# Altium PCB JacDacRHTemp_Panel.PcbDoc (part 1 of 2)
Units mm, origin at the board's own origin, x right, y up, seen from the top; angles counter-clockwise.
Board outline 188.07 x 95 mm, 2 copper layers (Top Layer, Bottom Layer); 1 components, 34 nets, 50 pads, 167 vias.
Unrouted connection lines stored in the file: 5.
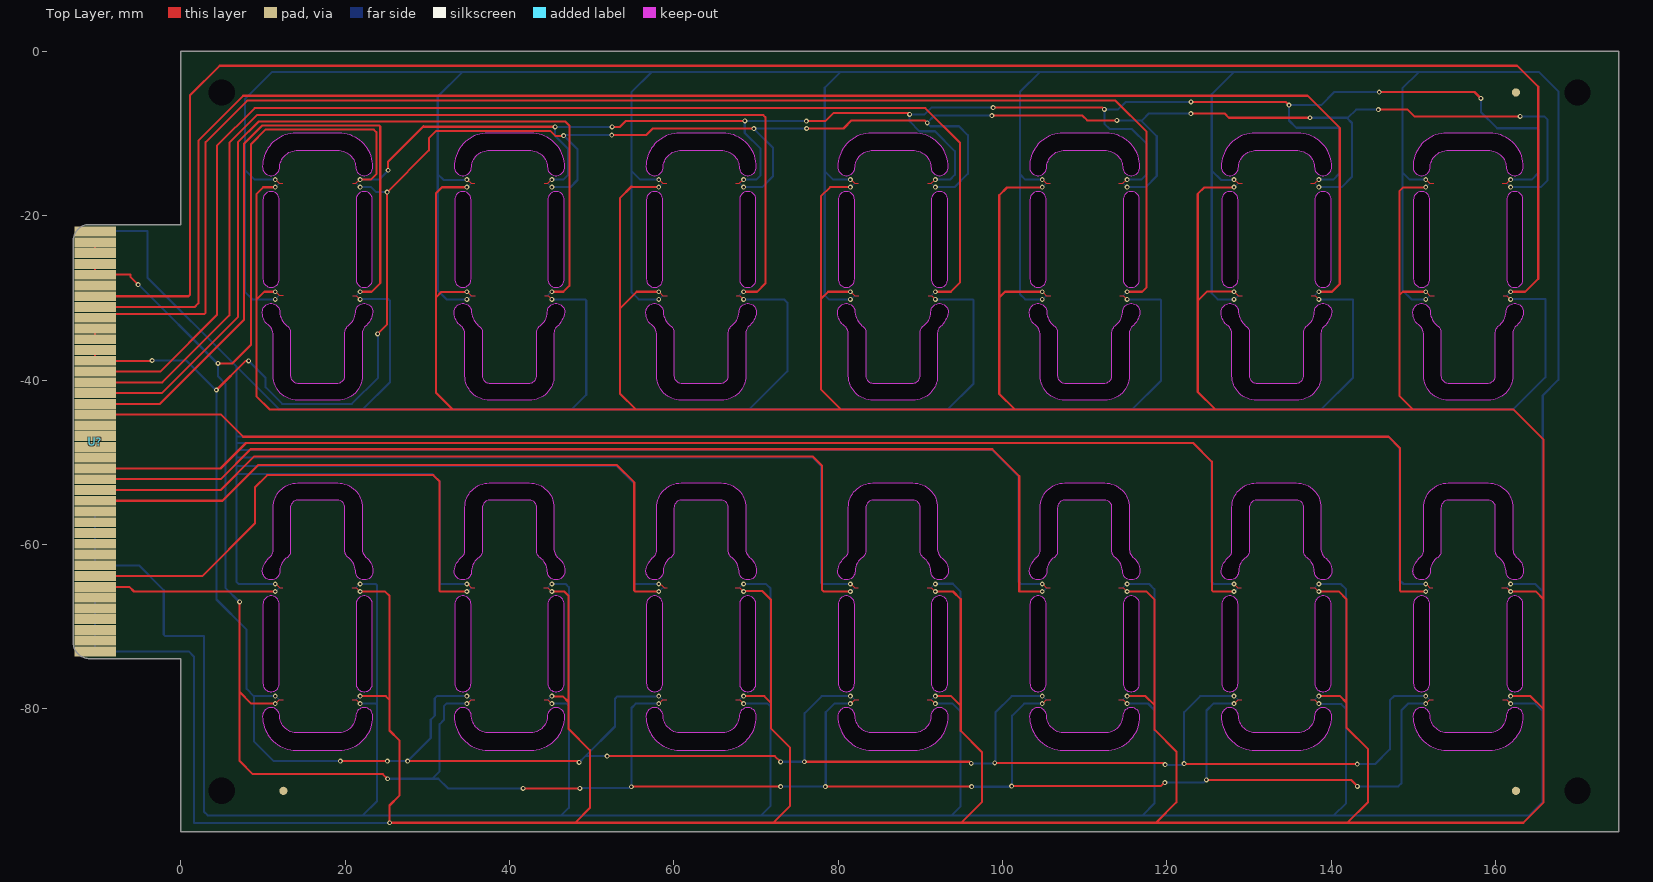
[diagram p0: Top Layer view]
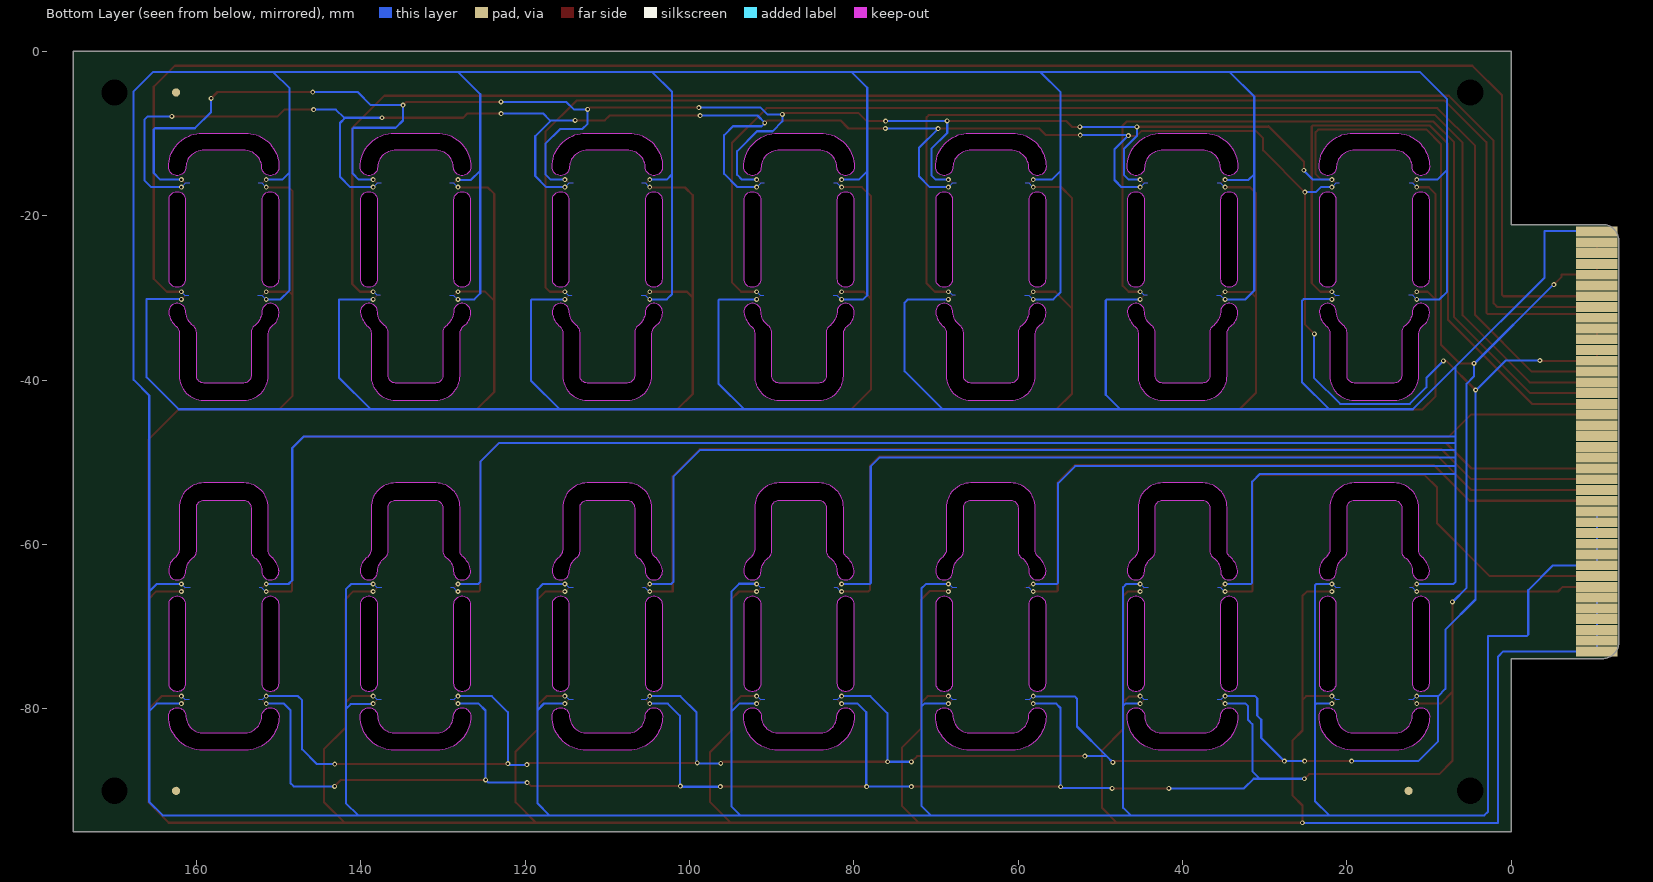
[diagram p1: Bottom Layer view, seen from below]

## Layer stack, top to bottom
Top Solder: solder mask 0.0102, Solder Resist, Dk 3.5
Top Layer: signal copper 0.0356
Dielectric 1: dielectric 0.32, FR-4, Dk 4.8
Bottom Layer: signal copper 0.0356
Bottom Solder: solder mask 0.0102, Solder Resist, Dk 3.5

## Board outline
-11.067,-73.895 cw(c-11.129,-71.956) -13.067,-72.018 -13.067,-22.952 cw(c-11.129,-23.014) -11.067,-21.075 0,-21.075 0,-0.02 0,0 175,0 175,-95 0,-95 0,-73.895
cut-out: 9.95,-63.282 9.95,-63.238 cw(c10,-63.238) 9.951,-63.23 cw(c12.801,-63.636) 10.734,-61.631 cw(c12.801,-63.636) 10.734,-61.631 cw(c10.771,-61.666) 10.745,-61.622 ccw(c10.211,-60.731) 11.25,-60.731 ccw(c10.211,-60.731) 11.25,-60.708 cw(c11.3,-60.706) 11.25,-60.706 11.25,-55.512 cw(c14.224,-55.507) 14.219,-52.532 cw(c14.219,-52.583) 14.219,-52.532 16.566,-52.532 17.8,-52.532 cw(c17.8,-52.583) 17.802,-52.532 19.108,-52.532 cw(c19.109,-55.508) 22.085,-55.507 cw(c22.034,-55.507) 22.085,-55.507 22.085,-60.451 cw(c22.034,-60.451) 22.085,-60.453 cw(c23.564,-60.518) 22.085,-60.453 ccw(c23.564,-60.518) 22.505,-61.552 cw(c21.423,-63.197) 23.391,-63.197 cw(c21.423,-63.197) 23.391,-63.238 cw(c21.423,-63.197) 23.391,-63.239 23.391,-63.238 23.391,-63.282 ccw(c23.34,-63.282) 23.391,-63.282 cw(c22.34,-63.283) 23.391,-63.283 cw(c22.34,-63.283) 21.29,-63.282 cw(c21.34,-63.282) 21.29,-63.281 21.29,-63.24 ccw(c18.987,-63.427) 20.443,-61.633 cw(c20.955,-60.806) 19.984,-60.851 cw(c20.034,-60.849) 19.984,-60.849 19.984,-55.507 ccw(c19.109,-55.508) 19.108,-54.633 cw(c19.108,-54.583) 19.108,-54.633 16.566,-54.633 14.22,-54.633 cw(c14.247,-55.529) 14.221,-54.633 14.22,-54.633 ccw(c14.247,-55.529) 13.351,-55.556 cw(c13.3,-55.557) 13.351,-55.557 13.351,-60.698 cw(c12.31,-60.785) 13.354,-60.785 cw(c12.31,-60.785) 12.799,-61.708 ccw(c14.174,-63.328) 12.051,-63.239 ccw(c14.174,-63.328) 12.051,-63.24 12.051,-63.238 12.051,-63.282 cw(c11,-63.283) 12.051,-63.283 cw(c11,-63.283)
cut-out: 10,-76.932 ccw(c11,-76.933) 12,-76.932 12,-67.282 ccw(c11,-67.278) 10,-67.282
cut-out: 21.337,-76.932 ccw(c22.337,-76.933) 23.337,-76.932 23.337,-67.282 ccw(c22.337,-67.281) 21.337,-67.282
cut-out: 14.05,-85.051 ccw(c14.05,-85) 14.05,-85.051 19.284,-85.051 ccw(c19.288,-80.952) 23.387,-80.956 ccw(c23.336,-80.956) 23.387,-80.956 23.387,-80.931 ccw(c22.336,-80.927) 23.387,-80.927 ccw(c22.336,-80.927) 21.286,-80.931 ccw(c22.336,-80.927) 21.286,-80.931 21.286,-80.956 ccw(c21.336,-80.956) 21.286,-80.961 ccw(c21.336,-80.967) 21.286,-80.964 cw(c19.169,-80.832) 19.283,-82.95 18.735,-82.95 14.052,-82.95 cw(c14.174,-80.828) 12.051,-80.931 ccw(c12,-80.931) 12.051,-80.931 ccw(c12,-80.931) 12.051,-80.928 ccw(c11,-80.931) 9.95,-80.931 ccw(c11,-80.931) 9.95,-80.931 ccw(c14.069,-80.932) 9.95,-80.932 cw(c10,-80.931) 9.95,-80.931 9.95,-80.932 ccw(c14.069,-80.932)
cut-out: 19.288,-9.949 ccw(c19.287,-10) 19.287,-9.949 14.054,-9.949 ccw(c14.049,-14.048) 9.951,-14.044 ccw(c10.001,-14.044) 9.951,-14.044 9.951,-14.069 ccw(c11.001,-14.073) 9.951,-14.073 ccw(c11.001,-14.073) 12.052,-14.069 ccw(c11.001,-14.073) 12.052,-14.069 12.052,-14.044 ccw(c12.001,-14.044) 12.052,-14.039 ccw(c12.001,-14.033) 12.052,-14.036 cw(c14.168,-14.168) 14.055,-12.05 14.603,-12.05 19.286,-12.051 cw(c19.164,-14.173) 21.287,-14.069 ccw(c21.337,-14.069) 21.287,-14.069 ccw(c21.337,-14.069) 21.287,-14.072 ccw(c22.338,-14.069) 23.388,-14.069 ccw(c22.338,-14.069) 23.388,-14.069 ccw(c19.269,-14.068) 23.388,-14.068 cw(c23.337,-14.069) 23.388,-14.069 23.388,-14.068 ccw(c19.269,-14.068)
cut-out: 12,-18.068 ccw(c11,-18.067) 10,-18.068 10,-27.718 ccw(c11,-27.72) 12,-27.718
cut-out: 23.337,-18.068 ccw(c22.337,-18.067) 21.337,-18.068 21.337,-27.718 ccw(c22.337,-27.722) 23.337,-27.718
cut-out: 23.388,-31.718 23.388,-31.762 cw(c23.337,-31.762) 23.387,-31.77 cw(c20.536,-31.364) 22.604,-33.369 cw(c20.536,-31.364) 22.603,-33.369 22.604,-33.369 cw(c22.567,-33.334) 22.593,-33.378 ccw(c23.127,-34.269) 22.088,-34.269 ccw(c23.127,-34.269) 22.088,-34.292 cw(c22.037,-34.294) 22.088,-34.294 22.088,-39.488 cw(c19.113,-39.493) 19.119,-42.468 cw(c19.119,-42.417) 19.119,-42.468 16.771,-42.468 15.538,-42.468 cw(c15.538,-42.418) 15.536,-42.468 14.23,-42.468 cw(c14.229,-39.492) 11.253,-39.493 cw(c11.303,-39.493) 11.253,-39.493 11.253,-34.549 cw(c11.303,-34.549) 11.253,-34.547 cw(c9.774,-34.482) 11.253,-34.547 ccw(c9.774,-34.482) 10.833,-33.448 cw(c11.915,-31.803) 9.947,-31.803 cw(c11.915,-31.803) 9.947,-31.762 cw(c11.915,-31.803) 9.947,-31.761 9.947,-31.762 9.947,-31.718 ccw(c9.997,-31.718) 9.947,-31.719 cw(c10.997,-31.717) 9.947,-31.717 cw(c10.997,-31.717) 12.048,-31.719 cw(c11.997,-31.718) 12.048,-31.719 12.048,-31.76 ccw(c14.351,-31.574) 12.895,-33.367 cw(c12.383,-34.194) 13.354,-34.149 cw(c13.303,-34.151) 13.354,-34.151 13.354,-39.493 ccw(c14.229,-39.492) 14.23,-40.367 cw(c14.23,-40.417) 14.23,-40.367 16.771,-40.367 19.118,-40.367 cw(c19.091,-39.471) 19.117,-40.367 19.118,-40.367 ccw(c19.091,-39.471) 19.987,-39.445 cw(c20.037,-39.443) 19.987,-39.443 19.987,-34.302 cw(c21.028,-34.215) 19.983,-34.215 cw(c21.028,-34.215) 20.538,-33.292 ccw(c19.164,-31.672) 21.287,-31.761 ccw(c19.164,-31.672) 21.287,-31.76 21.287,-31.762 21.287,-31.719 cw(c22.337,-31.717) 21.287,-31.717 cw(c22.337,-31.717)
cut-out: 149.972,-63.282 149.972,-63.238 cw(c150.022,-63.238) 149.973,-63.23 cw(c152.823,-63.636) 150.756,-61.631 cw(c152.823,-63.636) 150.756,-61.631 cw(c150.793,-61.666) 150.767,-61.622 ccw(c150.233,-60.731) 151.272,-60.731 ccw(c150.233,-60.731) 151.272,-60.708 cw(c151.322,-60.706) 151.272,-60.706 151.272,-55.512 cw(c154.246,-55.507) 154.241,-52.532 cw(c154.241,-52.583) 154.241,-52.532 156.588,-52.532 157.822,-52.532 cw(c157.822,-52.583) 157.824,-52.532 159.13,-52.532 cw(c159.131,-55.508) 162.107,-55.507 cw(c162.056,-55.507) 162.107,-55.507 162.107,-60.451 cw(c162.056,-60.451) 162.107,-60.453 cw(c163.586,-60.518) 162.107,-60.453 ccw(c163.586,-60.518) 162.527,-61.552 cw(c161.445,-63.197) 163.413,-63.197 cw(c161.445,-63.197) 163.413,-63.238 cw(c161.445,-63.197) 163.413,-63.239 163.413,-63.238 163.413,-63.282 ccw(c163.362,-63.282) 163.413,-63.282 cw(c162.362,-63.283) 163.413,-63.283 cw(c162.362,-63.283) 161.312,-63.282 cw(c161.362,-63.282) 161.312,-63.281 161.312,-63.24 ccw(c159.009,-63.427) 160.465,-61.633 cw(c160.977,-60.806) 160.006,-60.851 cw(c160.056,-60.849) 160.006,-60.849 160.006,-55.507 ccw(c159.131,-55.508) 159.13,-54.633 cw(c159.13,-54.583) 159.13,-54.633 156.588,-54.633 154.242,-54.633 cw(c154.269,-55.529) 154.243,-54.633 154.242,-54.633 ccw(c154.269,-55.529) 153.373,-55.556 cw(c153.322,-55.557) 153.373,-55.557 153.373,-60.698 cw(c152.332,-60.785) 153.376,-60.785 cw(c152.332,-60.785) 152.821,-61.708 ccw(c154.196,-63.328) 152.073,-63.239 ccw(c154.196,-63.328) 152.073,-63.24 152.073,-63.238 152.073,-63.282 cw(c151.022,-63.283) 152.073,-63.283 cw(c151.022,-63.283)
cut-out: 150.022,-76.932 ccw(c151.022,-76.933) 152.022,-76.932 152.022,-67.282 ccw(c151.022,-67.278) 150.022,-67.282
cut-out: 161.359,-76.932 ccw(c162.359,-76.933) 163.359,-76.932 163.359,-67.282 ccw(c162.359,-67.281) 161.359,-67.282
cut-out: 154.072,-85.051 ccw(c154.072,-85) 154.072,-85.051 159.306,-85.051 ccw(c159.31,-80.952) 163.409,-80.956 ccw(c163.358,-80.956) 163.409,-80.956 163.409,-80.931 ccw(c162.358,-80.927) 163.409,-80.927 ccw(c162.358,-80.927) 161.308,-80.931 ccw(c162.358,-80.927) 161.308,-80.931 161.308,-80.956 ccw(c161.358,-80.956) 161.308,-80.961 ccw(c161.358,-80.967) 161.308,-80.964 cw(c159.191,-80.832) 159.305,-82.95 158.757,-82.95 154.074,-82.95 cw(c154.196,-80.828) 152.073,-80.931 ccw(c152.022,-80.931) 152.073,-80.931 ccw(c152.022,-80.931) 152.073,-80.928 ccw(c151.022,-80.931) 149.972,-80.931 ccw(c151.022,-80.931) 149.972,-80.931 ccw(c154.091,-80.932) 149.972,-80.932 cw(c150.022,-80.931) 149.972,-80.931 149.972,-80.932 ccw(c154.091,-80.932)
cut-out: 126.635,-63.282 126.635,-63.238 cw(c126.685,-63.238) 126.636,-63.23 cw(c129.486,-63.636) 127.419,-61.631 cw(c129.486,-63.636) 127.419,-61.631 cw(c127.456,-61.666) 127.43,-61.622 ccw(c126.896,-60.731) 127.935,-60.731 ccw(c126.896,-60.731) 127.935,-60.708 cw(c127.985,-60.706) 127.935,-60.706 127.935,-55.512 cw(c130.909,-55.507) 130.904,-52.532 cw(c130.904,-52.583) 130.904,-52.532 133.251,-52.532 134.485,-52.532 cw(c134.485,-52.583) 134.487,-52.532 135.793,-52.532 cw(c135.794,-55.508) 138.77,-55.507 cw(c138.719,-55.507) 138.77,-55.507 138.77,-60.451 cw(c138.719,-60.451) 138.77,-60.453 cw(c140.249,-60.518) 138.77,-60.453 ccw(c140.249,-60.518) 139.19,-61.552 cw(c138.108,-63.197) 140.076,-63.197 cw(c138.108,-63.197) 140.076,-63.238 cw(c138.108,-63.197) 140.076,-63.239 140.076,-63.238 140.076,-63.282 ccw(c140.025,-63.282) 140.076,-63.282 cw(c139.025,-63.283) 140.076,-63.283 cw(c139.025,-63.283) 137.975,-63.282 cw(c138.025,-63.282) 137.975,-63.281 137.975,-63.24 ccw(c135.672,-63.427) 137.128,-61.633 cw(c137.64,-60.806) 136.669,-60.851 cw(c136.719,-60.849) 136.669,-60.849 136.669,-55.507 ccw(c135.794,-55.508) 135.793,-54.633 cw(c135.793,-54.583) 135.793,-54.633 133.251,-54.633 130.905,-54.633 cw(c130.932,-55.529) 130.906,-54.633 130.905,-54.633 ccw(c130.932,-55.529) 130.036,-55.556 cw(c129.985,-55.557) 130.036,-55.557 130.036,-60.698 cw(c128.995,-60.785) 130.039,-60.785 cw(c128.995,-60.785) 129.484,-61.708 ccw(c130.859,-63.328) 128.736,-63.239 ccw(c130.859,-63.328) 128.736,-63.24 128.736,-63.238 128.736,-63.282 cw(c127.685,-63.283) 128.736,-63.283 cw(c127.685,-63.283)
cut-out: 126.685,-76.932 ccw(c127.685,-76.933) 128.685,-76.932 128.685,-67.282 ccw(c127.685,-67.278) 126.685,-67.282
cut-out: 138.022,-76.932 ccw(c139.022,-76.933) 140.022,-76.932 140.022,-67.282 ccw(c139.022,-67.281) 138.022,-67.282
cut-out: 130.735,-85.051 ccw(c130.735,-85) 130.735,-85.051 135.969,-85.051 ccw(c135.973,-80.952) 140.072,-80.956 ccw(c140.021,-80.956) 140.072,-80.956 140.072,-80.931 ccw(c139.021,-80.927) 140.072,-80.927 ccw(c139.021,-80.927) 137.971,-80.931 ccw(c139.021,-80.927) 137.971,-80.931 137.971,-80.956 ccw(c138.021,-80.956) 137.971,-80.961 ccw(c138.021,-80.967) 137.971,-80.964 cw(c135.854,-80.832) 135.968,-82.95 135.42,-82.95 130.737,-82.95 cw(c130.859,-80.828) 128.736,-80.931 ccw(c128.685,-80.931) 128.736,-80.931 ccw(c128.685,-80.931) 128.736,-80.928 ccw(c127.685,-80.931) 126.635,-80.931 ccw(c127.685,-80.931) 126.635,-80.931 ccw(c130.754,-80.932) 126.635,-80.932 cw(c126.685,-80.931) 126.635,-80.931 126.635,-80.932 ccw(c130.754,-80.932)
cut-out: 103.298,-63.282 103.298,-63.238 cw(c103.348,-63.238) 103.299,-63.23 cw(c106.149,-63.636) 104.082,-61.631 cw(c106.149,-63.636) 104.082,-61.631 cw(c104.119,-61.666) 104.093,-61.622 ccw(c103.559,-60.731) 104.598,-60.731 ccw(c103.559,-60.731) 104.598,-60.708 cw(c104.648,-60.706) 104.598,-60.706 104.598,-55.512 cw(c107.572,-55.507) 107.567,-52.532 cw(c107.567,-52.583) 107.567,-52.532 109.914,-52.532 111.148,-52.532 cw(c111.148,-52.583) 111.15,-52.532 112.456,-52.532 cw(c112.457,-55.508) 115.433,-55.507 cw(c115.382,-55.507) 115.433,-55.507 115.433,-60.451 cw(c115.382,-60.451) 115.433,-60.453 cw(c116.912,-60.518) 115.433,-60.453 ccw(c116.912,-60.518) 115.853,-61.552 cw(c114.771,-63.197) 116.739,-63.197 cw(c114.771,-63.197) 116.739,-63.238 cw(c114.771,-63.197) 116.739,-63.239 116.739,-63.238 116.739,-63.282 ccw(c116.688,-63.282) 116.739,-63.282 cw(c115.688,-63.283) 116.739,-63.283 cw(c115.688,-63.283) 114.638,-63.282 cw(c114.688,-63.282) 114.638,-63.281 114.638,-63.24 ccw(c112.335,-63.427) 113.791,-61.633 cw(c114.303,-60.806) 113.332,-60.851 cw(c113.382,-60.849) 113.332,-60.849 113.332,-55.507 ccw(c112.457,-55.508) 112.456,-54.633 cw(c112.456,-54.583) 112.456,-54.633 109.914,-54.633 107.568,-54.633 cw(c107.595,-55.529) 107.569,-54.633 107.568,-54.633 ccw(c107.595,-55.529) 106.699,-55.556 cw(c106.648,-55.557) 106.699,-55.557 106.699,-60.698 cw(c105.658,-60.785) 106.702,-60.785 cw(c105.658,-60.785) 106.147,-61.708 ccw(c107.522,-63.328) 105.399,-63.239 ccw(c107.522,-63.328) 105.399,-63.24 105.399,-63.238 105.399,-63.282 cw(c104.348,-63.283) 105.399,-63.283 cw(c104.348,-63.283)
cut-out: 103.348,-76.932 ccw(c104.348,-76.933) 105.348,-76.932 105.348,-67.282 ccw(c104.348,-67.278) 103.348,-67.282
cut-out: 114.685,-76.932 ccw(c115.685,-76.933) 116.685,-76.932 116.685,-67.282 ccw(c115.685,-67.281) 114.685,-67.282
cut-out: 107.398,-85.051 ccw(c107.398,-85) 107.398,-85.051 112.632,-85.051 ccw(c112.636,-80.952) 116.735,-80.956 ccw(c116.684,-80.956) 116.735,-80.956 116.735,-80.931 ccw(c115.684,-80.927) 116.735,-80.927 ccw(c115.684,-80.927) 114.634,-80.931 ccw(c115.684,-80.927) 114.634,-80.931 114.634,-80.956 ccw(c114.684,-80.956) 114.634,-80.961 ccw(c114.684,-80.967) 114.634,-80.964 cw(c112.517,-80.832) 112.631,-82.95 112.083,-82.95 107.4,-82.95 cw(c107.522,-80.828) 105.399,-80.931 ccw(c105.348,-80.931) 105.399,-80.931 ccw(c105.348,-80.931) 105.399,-80.928 ccw(c104.348,-80.931) 103.298,-80.931 ccw(c104.348,-80.931) 103.298,-80.931 ccw(c107.417,-80.932) 103.298,-80.932 cw(c103.348,-80.931) 103.298,-80.931 103.298,-80.932 ccw(c107.417,-80.932)
cut-out: 79.961,-63.282 79.961,-63.238 cw(c80.011,-63.238) 79.962,-63.23 cw(c82.812,-63.636) 80.745,-61.631 cw(c82.812,-63.636) 80.745,-61.631 cw(c80.782,-61.666) 80.756,-61.622 ccw(c80.222,-60.731) 81.261,-60.731 ccw(c80.222,-60.731) 81.261,-60.708 cw(c81.311,-60.706) 81.261,-60.706 81.261,-55.512 cw(c84.235,-55.507) 84.23,-52.532 cw(c84.23,-52.583) 84.23,-52.532 86.577,-52.532 87.811,-52.532 cw(c87.811,-52.583) 87.813,-52.532 89.119,-52.532 cw(c89.12,-55.508) 92.096,-55.507 cw(c92.045,-55.507) 92.096,-55.507 92.096,-60.451 cw(c92.045,-60.451) 92.096,-60.453 cw(c93.575,-60.518) 92.096,-60.453 ccw(c93.575,-60.518) 92.516,-61.552 cw(c91.434,-63.197) 93.402,-63.197 cw(c91.434,-63.197) 93.402,-63.238 cw(c91.434,-63.197) 93.402,-63.239 93.402,-63.238 93.402,-63.282 ccw(c93.351,-63.282) 93.402,-63.282 cw(c92.351,-63.283) 93.402,-63.283 cw(c92.351,-63.283) 91.301,-63.282 cw(c91.351,-63.282) 91.301,-63.281 91.301,-63.24 ccw(c88.998,-63.427) 90.454,-61.633 cw(c90.966,-60.806) 89.995,-60.851 cw(c90.045,-60.849) 89.995,-60.849 89.995,-55.507 ccw(c89.12,-55.508) 89.119,-54.633 cw(c89.119,-54.583) 89.119,-54.633 86.577,-54.633 84.231,-54.633 cw(c84.258,-55.529) 84.232,-54.633 84.231,-54.633 ccw(c84.258,-55.529) 83.362,-55.556 cw(c83.311,-55.557) 83.362,-55.557 83.362,-60.698 cw(c82.321,-60.785) 83.365,-60.785 cw(c82.321,-60.785) 82.81,-61.708 ccw(c84.185,-63.328) 82.062,-63.239 ccw(c84.185,-63.328) 82.062,-63.24 82.062,-63.238 82.062,-63.282 cw(c81.011,-63.283) 82.062,-63.283 cw(c81.011,-63.283)
cut-out: 80.011,-76.932 ccw(c81.011,-76.933) 82.011,-76.932 82.011,-67.282 ccw(c81.011,-67.278) 80.011,-67.282
cut-out: 91.348,-76.932 ccw(c92.348,-76.933) 93.348,-76.932 93.348,-67.282 ccw(c92.348,-67.281) 91.348,-67.282
cut-out: 84.061,-85.051 ccw(c84.061,-85) 84.061,-85.051 89.295,-85.051 ccw(c89.299,-80.952) 93.398,-80.956 ccw(c93.347,-80.956) 93.398,-80.956 93.398,-80.931 ccw(c92.347,-80.927) 93.398,-80.927 ccw(c92.347,-80.927) 91.297,-80.931 ccw(c92.347,-80.927) 91.297,-80.931 91.297,-80.956 ccw(c91.347,-80.956) 91.297,-80.961 ccw(c91.347,-80.967) 91.297,-80.964 cw(c89.18,-80.832) 89.294,-82.95 88.746,-82.95 84.063,-82.95 cw(c84.185,-80.828) 82.062,-80.931 ccw(c82.011,-80.931) 82.062,-80.931 ccw(c82.011,-80.931) 82.062,-80.928 ccw(c81.011,-80.931) 79.961,-80.931 ccw(c81.011,-80.931) 79.961,-80.931 ccw(c84.08,-80.932) 79.961,-80.932 cw(c80.011,-80.931) 79.961,-80.931 79.961,-80.932 ccw(c84.08,-80.932)
cut-out: 56.624,-63.282 56.624,-63.238 cw(c56.674,-63.238) 56.625,-63.23 cw(c59.475,-63.636) 57.408,-61.631 cw(c59.475,-63.636) 57.408,-61.631 cw(c57.445,-61.666) 57.419,-61.622 ccw(c56.885,-60.731) 57.924,-60.731 ccw(c56.885,-60.731) 57.924,-60.708 cw(c57.974,-60.706) 57.924,-60.706 57.924,-55.512 cw(c60.898,-55.507) 60.893,-52.532 cw(c60.893,-52.583) 60.893,-52.532 63.24,-52.532 64.474,-52.532 cw(c64.474,-52.583) 64.476,-52.532 65.782,-52.532 cw(c65.783,-55.508) 68.759,-55.507 cw(c68.708,-55.507) 68.759,-55.507 68.759,-60.451 cw(c68.708,-60.451) 68.759,-60.453 cw(c70.238,-60.518) 68.759,-60.453 ccw(c70.238,-60.518) 69.179,-61.552 cw(c68.097,-63.197) 70.065,-63.197 cw(c68.097,-63.197) 70.065,-63.238 cw(c68.097,-63.197) 70.065,-63.239 70.065,-63.238 70.065,-63.282 ccw(c70.014,-63.282) 70.065,-63.282 cw(c69.014,-63.283) 70.065,-63.283 cw(c69.014,-63.283) 67.964,-63.282 cw(c68.014,-63.282) 67.964,-63.281 67.964,-63.24 ccw(c65.661,-63.427) 67.117,-61.633 cw(c67.629,-60.806) 66.658,-60.851 cw(c66.708,-60.849) 66.658,-60.849 66.658,-55.507 ccw(c65.783,-55.508) 65.782,-54.633 cw(c65.782,-54.583) 65.782,-54.633 63.24,-54.633 60.894,-54.633 cw(c60.921,-55.529) 60.895,-54.633 60.894,-54.633 ccw(c60.921,-55.529) 60.025,-55.556 cw(c59.974,-55.557) 60.025,-55.557 60.025,-60.698 cw(c58.984,-60.785) 60.028,-60.785 cw(c58.984,-60.785) 59.473,-61.708 ccw(c60.848,-63.328) 58.725,-63.239 ccw(c60.848,-63.328) 58.725,-63.24 58.725,-63.238 58.725,-63.282 cw(c57.674,-63.283) 58.725,-63.283 cw(c57.674,-63.283)
cut-out: 56.674,-76.932 ccw(c57.674,-76.933) 58.674,-76.932 58.674,-67.282 ccw(c57.674,-67.278) 56.674,-67.282
cut-out: 68.011,-76.932 ccw(c69.011,-76.933) 70.011,-76.932 70.011,-67.282 ccw(c69.011,-67.281) 68.011,-67.282
cut-out: 60.724,-85.051 ccw(c60.724,-85) 60.724,-85.051 65.958,-85.051 ccw(c65.962,-80.952) 70.061,-80.956 ccw(c70.01,-80.956) 70.061,-80.956 70.061,-80.931 ccw(c69.01,-80.927) 70.061,-80.927 ccw(c69.01,-80.927) 67.96,-80.931 ccw(c69.01,-80.927) 67.96,-80.931 67.96,-80.956 ccw(c68.01,-80.956) 67.96,-80.961 ccw(c68.01,-80.967) 67.96,-80.964 cw(c65.843,-80.832) 65.957,-82.95 65.409,-82.95 60.726,-82.95 cw(c60.848,-80.828) 58.725,-80.931 ccw(c58.674,-80.931) 58.725,-80.931 ccw(c58.674,-80.931) 58.725,-80.928 ccw(c57.674,-80.931) 56.624,-80.931 ccw(c57.674,-80.931) 56.624,-80.931 ccw(c60.743,-80.932) 56.624,-80.932 cw(c56.674,-80.931) 56.624,-80.931 56.624,-80.932 ccw(c60.743,-80.932)
cut-out: 37.387,-85.051 ccw(c37.387,-85) 37.387,-85.051 42.621,-85.051 ccw(c42.625,-80.952) 46.724,-80.956 ccw(c46.673,-80.956) 46.724,-80.956 46.724,-80.931 ccw(c45.673,-80.927) 46.724,-80.927 ccw(c45.673,-80.927) 44.623,-80.931 ccw(c45.673,-80.927) 44.623,-80.931 44.623,-80.956 ccw(c44.673,-80.956) 44.623,-80.961 ccw(c44.673,-80.967) 44.623,-80.964 cw(c42.506,-80.832) 42.62,-82.95 42.072,-82.95 37.389,-82.95 cw(c37.511,-80.828) 35.388,-80.931 ccw(c35.337,-80.931) 35.388,-80.931 ccw(c35.337,-80.931) 35.388,-80.928 ccw(c34.337,-80.931) 33.287,-80.931 ccw(c34.337,-80.931) 33.287,-80.931 ccw(c37.406,-80.932) 33.287,-80.932 cw(c33.337,-80.931) 33.287,-80.931 33.287,-80.932 ccw(c37.406,-80.932)
cut-out: 44.674,-76.932 ccw(c45.674,-76.933) 46.674,-76.932 46.674,-67.282 ccw(c45.674,-67.281) 44.674,-67.282
cut-out: 33.337,-76.932 ccw(c34.337,-76.933) 35.337,-76.932 35.337,-67.282 ccw(c34.337,-67.278) 33.337,-67.282
cut-out: 33.287,-63.282 33.287,-63.238 cw(c33.337,-63.238) 33.288,-63.23 cw(c36.138,-63.636) 34.071,-61.631 cw(c36.138,-63.636) 34.071,-61.631 cw(c34.108,-61.666) 34.082,-61.622 ccw(c33.548,-60.731) 34.587,-60.731 ccw(c33.548,-60.731) 34.587,-60.708 cw(c34.637,-60.706) 34.587,-60.706 34.587,-55.512 cw(c37.561,-55.507) 37.556,-52.532 cw(c37.556,-52.583) 37.556,-52.532 39.903,-52.532 41.137,-52.532 cw(c41.137,-52.583) 41.139,-52.532 42.445,-52.532 cw(c42.446,-55.508) 45.422,-55.507 cw(c45.371,-55.507) 45.422,-55.507 45.422,-60.451 cw(c45.371,-60.451) 45.422,-60.453 cw(c46.901,-60.518) 45.422,-60.453 ccw(c46.901,-60.518) 45.842,-61.552 cw(c44.76,-63.197) 46.728,-63.197 cw(c44.76,-63.197) 46.728,-63.238 cw(c44.76,-63.197) 46.728,-63.239 46.728,-63.238 46.728,-63.282 ccw(c46.677,-63.282) 46.728,-63.282 cw(c45.677,-63.283) 46.728,-63.283 cw(c45.677,-63.283) 44.627,-63.282 cw(c44.677,-63.282) 44.627,-63.281 44.627,-63.24 ccw(c42.324,-63.427) 43.78,-61.633 cw(c44.292,-60.806) 43.321,-60.851 cw(c43.371,-60.849) 43.321,-60.849 43.321,-55.507 ccw(c42.446,-55.508) 42.445,-54.633 cw(c42.445,-54.583) 42.445,-54.633 39.903,-54.633 37.557,-54.633 cw(c37.584,-55.529) 37.558,-54.633 37.557,-54.633 ccw(c37.584,-55.529) 36.688,-55.556 cw(c36.637,-55.557) 36.688,-55.557 36.688,-60.698 cw(c35.647,-60.785) 36.691,-60.785 cw(c35.647,-60.785) 36.136,-61.708 ccw(c37.511,-63.328) 35.388,-63.239 ccw(c37.511,-63.328) 35.388,-63.24 35.388,-63.238 35.388,-63.282 cw(c34.337,-63.283) 35.388,-63.283 cw(c34.337,-63.283)
cut-out: 159.31,-9.95 ccw(c159.309,-10) 159.309,-9.95 154.075,-9.95 ccw(c154.071,-14.048) 149.973,-14.044 ccw(c150.023,-14.044) 149.973,-14.044 149.973,-14.069 ccw(c151.023,-14.074) 149.973,-14.074 ccw(c151.023,-14.074) 152.074,-14.069 ccw(c151.023,-14.074) 152.074,-14.069 152.074,-14.044 ccw(c152.023,-14.044) 152.074,-14.039 ccw(c152.023,-14.033) 152.074,-14.037 cw(c154.19,-14.168) 154.077,-12.051 154.624,-12.051 159.308,-12.051 cw(c159.186,-14.173) 161.309,-14.069 ccw(c161.359,-14.069) 161.309,-14.069 ccw(c161.359,-14.069) 161.309,-14.072 ccw(c162.359,-14.069) 163.41,-14.069 ccw(c162.359,-14.069) 163.41,-14.069 ccw(c159.291,-14.068) 163.41,-14.068 cw(c163.359,-14.069) 163.41,-14.069 163.41,-14.068 ccw(c159.291,-14.068)
cut-out: 152.022,-18.069 ccw(c151.022,-18.068) 150.022,-18.069 150.022,-27.719 ccw(c151.022,-27.72) 152.022,-27.719
cut-out: 163.359,-18.069 ccw(c162.359,-18.067) 161.359,-18.069 161.359,-27.719 ccw(c162.359,-27.722) 163.359,-27.719
cut-out: 163.41,-31.719 163.41,-31.763 cw(c163.359,-31.763) 163.409,-31.77 cw(c160.558,-31.364) 162.626,-33.369 cw(c160.558,-31.364) 162.625,-33.369 162.626,-33.369 cw(c162.589,-33.334) 162.615,-33.378 ccw(c163.149,-34.27) 162.11,-34.27 ccw(c163.149,-34.27) 162.11,-34.292 cw(c162.059,-34.294) 162.11,-34.294 162.11,-39.488 cw(c159.135,-39.494) 159.141,-42.468 cw(c159.141,-42.418) 159.141,-42.468 156.793,-42.468 155.56,-42.468 cw(c155.56,-42.418) 155.558,-42.468 154.252,-42.468 cw(c154.251,-39.492) 151.275,-39.493 cw(c151.325,-39.493) 151.275,-39.493 151.275,-34.55 cw(c151.325,-34.55) 151.275,-34.547 cw(c149.796,-34.482) 151.275,-34.547 ccw(c149.796,-34.482) 150.855,-33.448 cw(c151.937,-31.803) 149.969,-31.803 cw(c151.937,-31.803) 149.969,-31.762 cw(c151.937,-31.803) 149.969,-31.761 149.969,-31.762 149.969,-31.719 ccw(c150.019,-31.719) 149.969,-31.719 cw(c151.019,-31.717) 149.969,-31.717 cw(c151.019,-31.717) 152.07,-31.719 cw(c152.019,-31.719) 152.07,-31.719 152.07,-31.76 ccw(c154.373,-31.574) 152.917,-33.368 cw(c152.405,-34.194) 153.376,-34.149 cw(c153.325,-34.151) 153.376,-34.151 153.376,-39.493 ccw(c154.251,-39.492) 154.252,-40.367 cw(c154.252,-40.417) 154.252,-40.367 156.793,-40.367 159.14,-40.367 cw(c159.113,-39.471) 159.139,-40.367 159.14,-40.367 ccw(c159.113,-39.471) 160.009,-39.445 cw(c160.059,-39.443) 160.009,-39.443 160.009,-34.302 cw(c161.05,-34.215) 160.005,-34.215 cw(c161.05,-34.215) 160.56,-33.292 ccw(c159.186,-31.672) 161.309,-31.762 ccw(c159.186,-31.672) 161.309,-31.761 161.309,-31.763 161.309,-31.719 cw(c162.359,-31.717) 161.309,-31.717 cw(c162.359,-31.717)
cut-out: 135.973,-9.95 ccw(c135.972,-10) 135.972,-9.95 130.738,-9.95 ccw(c130.734,-14.048) 126.636,-14.044 ccw(c126.686,-14.044) 126.636,-14.044 126.636,-14.069 ccw(c127.686,-14.074) 126.636,-14.074 ccw(c127.686,-14.074) 128.737,-14.069 ccw(c127.686,-14.074) 128.737,-14.069 128.737,-14.044 ccw(c128.686,-14.044) 128.737,-14.039 ccw(c128.686,-14.033) 128.737,-14.037 cw(c130.853,-14.168) 130.74,-12.051 131.287,-12.051 135.971,-12.051 cw(c135.849,-14.173) 137.972,-14.069 ccw(c138.022,-14.069) 137.972,-14.069 ccw(c138.022,-14.069) 137.972,-14.072 ccw(c139.022,-14.069) 140.073,-14.069 ccw(c139.022,-14.069) 140.073,-14.069 ccw(c135.954,-14.068) 140.073,-14.068 cw(c140.022,-14.069) 140.073,-14.069 140.073,-14.068 ccw(c135.954,-14.068)
cut-out: 128.685,-18.069 ccw(c127.685,-18.068) 126.685,-18.069 126.685,-27.719 ccw(c127.685,-27.72) 128.685,-27.719
cut-out: 140.022,-18.069 ccw(c139.022,-18.067) 138.022,-18.069 138.022,-27.719 ccw(c139.022,-27.722) 140.022,-27.719
cut-out: 140.073,-31.719 140.073,-31.763 cw(c140.022,-31.763) 140.072,-31.77 cw(c137.221,-31.364) 139.289,-33.369 cw(c137.221,-31.364) 139.288,-33.369 139.289,-33.369 cw(c139.252,-33.334) 139.278,-33.378 ccw(c139.812,-34.27) 138.773,-34.27 ccw(c139.812,-34.27) 138.773,-34.292 cw(c138.722,-34.294) 138.773,-34.294 138.773,-39.488 cw(c135.798,-39.494) 135.804,-42.468 cw(c135.804,-42.418) 135.804,-42.468 133.456,-42.468 132.223,-42.468 cw(c132.223,-42.418) 132.221,-42.468 130.915,-42.468 cw(c130.914,-39.492) 127.938,-39.493 cw(c127.988,-39.493) 127.938,-39.493 127.938,-34.55 cw(c127.988,-34.55) 127.938,-34.547 cw(c126.459,-34.482) 127.938,-34.547 ccw(c126.459,-34.482) 127.518,-33.448 cw(c128.6,-31.803) 126.632,-31.803 cw(c128.6,-31.803) 126.632,-31.762 cw(c128.6,-31.803) 126.632,-31.761 126.632,-31.762 126.632,-31.719 ccw(c126.682,-31.719) 126.632,-31.719 cw(c127.682,-31.717) 126.632,-31.717 cw(c127.682,-31.717) 128.733,-31.719 cw(c128.682,-31.719) 128.733,-31.719 128.733,-31.76 ccw(c131.036,-31.574) 129.58,-33.368 cw(c129.068,-34.194) 130.039,-34.149 cw(c129.988,-34.151) 130.039,-34.151 130.039,-39.493 ccw(c130.914,-39.492) 130.915,-40.367 cw(c130.915,-40.417) 130.915,-40.367 133.456,-40.367 135.803,-40.367 cw(c135.776,-39.471) 135.802,-40.367 135.803,-40.367 ccw(c135.776,-39.471) 136.672,-39.445 cw(c136.722,-39.443) 136.672,-39.443 136.672,-34.302 cw(c137.713,-34.215) 136.668,-34.215 cw(c137.713,-34.215) 137.223,-33.292 ccw(c135.849,-31.672) 137.972,-31.762 ccw(c135.849,-31.672) 137.972,-31.761 137.972,-31.763 137.972,-31.719 cw(c139.022,-31.717) 137.972,-31.717 cw(c139.022,-31.717)
cut-out: 112.636,-9.95 ccw(c112.635,-10) 112.635,-9.95 107.401,-9.95 ccw(c107.397,-14.048) 103.299,-14.044 ccw(c103.349,-14.044) 103.299,-14.044 103.299,-14.069 ccw(c104.349,-14.074) 103.299,-14.074 ccw(c104.349,-14.074) 105.4,-14.069 ccw(c104.349,-14.074) 105.4,-14.069 105.4,-14.044 ccw(c105.349,-14.044) 105.4,-14.039 ccw(c105.349,-14.033) 105.4,-14.037 cw(c107.516,-14.168) 107.403,-12.051 107.95,-12.051 112.634,-12.051 cw(c112.512,-14.173) 114.635,-14.069 ccw(c114.685,-14.069) 114.635,-14.069 ccw(c114.685,-14.069) 114.635,-14.072 ccw(c115.685,-14.069) 116.736,-14.069 ccw(c115.685,-14.069) 116.736,-14.069 ccw(c112.617,-14.068) 116.736,-14.068 cw(c116.685,-14.069) 116.736,-14.069 116.736,-14.068 ccw(c112.617,-14.068)
cut-out: 105.348,-18.069 ccw(c104.348,-18.068) 103.348,-18.069 103.348,-27.719 ccw(c104.348,-27.72) 105.348,-27.719
cut-out: 116.685,-18.069 ccw(c115.685,-18.067) 114.685,-18.069 114.685,-27.719 ccw(c115.685,-27.722) 116.685,-27.719
cut-out: 116.736,-31.719 116.736,-31.763 cw(c116.685,-31.763) 116.735,-31.77 cw(c113.884,-31.364) 115.952,-33.369 cw(c113.884,-31.364) 115.951,-33.369 115.952,-33.369 cw(c115.915,-33.334) 115.941,-33.378 ccw(c116.475,-34.27) 115.436,-34.27 ccw(c116.475,-34.27) 115.436,-34.292 cw(c115.385,-34.294) 115.436,-34.294 115.436,-39.488 cw(c112.461,-39.494) 112.467,-42.468 cw(c112.467,-42.418) 112.467,-42.468 110.119,-42.468 108.886,-42.468 cw(c108.886,-42.418) 108.884,-42.468 107.578,-42.468 cw(c107.577,-39.492) 104.601,-39.493 cw(c104.651,-39.493) 104.601,-39.493 104.601,-34.55 cw(c104.651,-34.55) 104.601,-34.547 cw(c103.122,-34.482) 104.601,-34.547 ccw(c103.122,-34.482) 104.181,-33.448 cw(c105.263,-31.803) 103.295,-31.803 cw(c105.263,-31.803) 103.295,-31.762 cw(c105.263,-31.803) 103.295,-31.761 103.295,-31.762 103.295,-31.719 ccw(c103.345,-31.719) 103.295,-31.719 cw(c104.345,-31.717) 103.295,-31.717 cw(c104.345,-31.717) 105.396,-31.719 cw(c105.345,-31.719) 105.396,-31.719 105.396,-31.76 ccw(c107.699,-31.574) 106.243,-33.368 cw(c105.731,-34.194) 106.702,-34.149 cw(c106.651,-34.151) 106.702,-34.151 106.702,-39.493 ccw(c107.577,-39.492) 107.578,-40.367 cw(c107.578,-40.417) 107.578,-40.367 110.119,-40.367 112.466,-40.367 cw(c112.439,-39.471) 112.465,-40.367 112.466,-40.367 ccw(c112.439,-39.471) 113.335,-39.445 cw(c113.385,-39.443) 113.335,-39.443 113.335,-34.302 cw(c114.376,-34.215) 113.331,-34.215 cw(c114.376,-34.215) 113.886,-33.292 ccw(c112.512,-31.672) 114.635,-31.762 ccw(c112.512,-31.672) 114.635,-31.761 114.635,-31.763 114.635,-31.719 cw(c115.685,-31.717) 114.635,-31.717 cw(c115.685,-31.717)
cut-out: 89.299,-9.95 ccw(c89.298,-10) 89.298,-9.95 84.064,-9.95 ccw(c84.06,-14.048) 79.962,-14.044 ccw(c80.012,-14.044) 79.962,-14.044 79.962,-14.069 ccw(c81.012,-14.074) 79.962,-14.074 ccw(c81.012,-14.074) 82.063,-14.069 ccw(c81.012,-14.074) 82.063,-14.069 82.063,-14.044 ccw(c82.012,-14.044) 82.063,-14.039 ccw(c82.012,-14.033) 82.063,-14.037 cw(c84.179,-14.168) 84.066,-12.051 84.613,-12.051 89.297,-12.051 cw(c89.175,-14.173) 91.298,-14.069 ccw(c91.348,-14.069) 91.298,-14.069 ccw(c91.348,-14.069) 91.298,-14.072 ccw(c92.348,-14.069) 93.399,-14.069 ccw(c92.348,-14.069) 93.399,-14.069 ccw(c89.28,-14.068) 93.399,-14.068 cw(c93.348,-14.069) 93.399,-14.069 93.399,-14.068 ccw(c89.28,-14.068)
cut-out: 82.011,-18.069 ccw(c81.011,-18.068) 80.011,-18.069 80.011,-27.719 ccw(c81.011,-27.72) 82.011,-27.719
cut-out: 93.348,-18.069 ccw(c92.348,-18.067) 91.348,-18.069 91.348,-27.719 ccw(c92.348,-27.722) 93.348,-27.719
cut-out: 93.399,-31.719 93.399,-31.763 cw(c93.348,-31.763) 93.398,-31.77 cw(c90.547,-31.364) 92.615,-33.369 cw(c90.547,-31.364) 92.614,-33.369 92.615,-33.369 cw(c92.578,-33.334) 92.604,-33.378 ccw(c93.138,-34.27) 92.099,-34.27 ccw(c93.138,-34.27) 92.099,-34.292 cw(c92.048,-34.294) 92.099,-34.294 92.099,-39.488 cw(c89.124,-39.494) 89.13,-42.468 cw(c89.13,-42.418) 89.13,-42.468 86.782,-42.468 85.549,-42.468 cw(c85.549,-42.418) 85.547,-42.468 84.241,-42.468 cw(c84.24,-39.492) 81.264,-39.493 cw(c81.314,-39.493) 81.264,-39.493 81.264,-34.55 cw(c81.314,-34.55) 81.264,-34.547 cw(c79.785,-34.482) 81.264,-34.547 ccw(c79.785,-34.482) 80.844,-33.448 cw(c81.926,-31.803) 79.958,-31.803 cw(c81.926,-31.803) 79.958,-31.762 cw(c81.926,-31.803) 79.958,-31.761 79.958,-31.762 79.958,-31.719 ccw(c80.008,-31.719) 79.958,-31.719 cw(c81.008,-31.717) 79.958,-31.717 cw(c81.008,-31.717) 82.059,-31.719 cw(c82.008,-31.719) 82.059,-31.719 82.059,-31.76 ccw(c84.362,-31.574) 82.906,-33.368 cw(c82.394,-34.194) 83.365,-34.149 cw(c83.314,-34.151) 83.365,-34.151 83.365,-39.493 ccw(c84.24,-39.492) 84.241,-40.367 cw(c84.241,-40.417) 84.241,-40.367 86.782,-40.367 89.129,-40.367 cw(c89.102,-39.471) 89.128,-40.367 89.129,-40.367 ccw(c89.102,-39.471) 89.998,-39.445 cw(c90.048,-39.443) 89.998,-39.443 89.998,-34.302 cw(c91.039,-34.215) 89.994,-34.215 cw(c91.039,-34.215) 90.549,-33.292 ccw(c89.175,-31.672) 91.298,-31.762 ccw(c89.175,-31.672) 91.298,-31.761 91.298,-31.763 91.298,-31.719 cw(c92.348,-31.717) 91.298,-31.717 cw(c92.348,-31.717)
cut-out: 65.962,-9.95 ccw(c65.961,-10) 65.961,-9.95 60.727,-9.95 ccw(c60.723,-14.048) 56.625,-14.044 ccw(c56.675,-14.044) 56.625,-14.044 56.625,-14.069 ccw(c57.675,-14.074) 56.625,-14.074 ccw(c57.675,-14.074) 58.726,-14.069 ccw(c57.675,-14.074) 58.726,-14.069 58.726,-14.044 ccw(c58.675,-14.044) 58.726,-14.039 ccw(c58.675,-14.033) 58.726,-14.037 cw(c60.842,-14.168) 60.729,-12.051 61.276,-12.051 65.96,-12.051 cw(c65.838,-14.173) 67.961,-14.069 ccw(c68.011,-14.069) 67.961,-14.069 ccw(c68.011,-14.069) 67.961,-14.072 ccw(c69.011,-14.069) 70.062,-14.069 ccw(c69.011,-14.069) 70.062,-14.069 ccw(c65.943,-14.068) 70.062,-14.068 cw(c70.011,-14.069) 70.062,-14.069 70.062,-14.068 ccw(c65.943,-14.068)
cut-out: 58.674,-18.069 ccw(c57.674,-18.068) 56.674,-18.069 56.674,-27.719 ccw(c57.674,-27.72) 58.674,-27.719
cut-out: 70.011,-18.069 ccw(c69.011,-18.067) 68.011,-18.069 68.011,-27.719 ccw(c69.011,-27.722) 70.011,-27.719
cut-out: 70.062,-31.719 70.062,-31.763 cw(c70.011,-31.763) 70.061,-31.77 cw(c67.21,-31.364) 69.278,-33.369 cw(c67.21,-31.364) 69.277,-33.369 69.278,-33.369 cw(c69.241,-33.334) 69.267,-33.378 ccw(c69.801,-34.27) 68.762,-34.27 ccw(c69.801,-34.27) 68.762,-34.292 cw(c68.711,-34.294) 68.762,-34.294 68.762,-39.488 cw(c65.787,-39.494) 65.793,-42.468 cw(c65.793,-42.418) 65.793,-42.468 63.445,-42.468 62.212,-42.468 cw(c62.212,-42.418) 62.21,-42.468 60.904,-42.468 cw(c60.903,-39.492) 57.927,-39.493 cw(c57.977,-39.493) 57.927,-39.493 57.927,-34.55 cw(c57.977,-34.55) 57.927,-34.547 cw(c56.448,-34.482) 57.927,-34.547 ccw(c56.448,-34.482) 57.507,-33.448 cw(c58.589,-31.803) 56.621,-31.803 cw(c58.589,-31.803) 56.621,-31.762 cw(c58.589,-31.803) 56.621,-31.761 56.621,-31.762 56.621,-31.719 ccw(c56.671,-31.719) 56.621,-31.719 cw(c57.671,-31.717) 56.621,-31.717 cw(c57.671,-31.717) 58.722,-31.719 cw(c58.671,-31.719) 58.722,-31.719 58.722,-31.76 ccw(c61.025,-31.574) 59.569,-33.368 cw(c59.057,-34.194) 60.028,-34.149 cw(c59.977,-34.151) 60.028,-34.151 60.028,-39.493 ccw(c60.903,-39.492) 60.904,-40.367 cw(c60.904,-40.417) 60.904,-40.367 63.445,-40.367 65.792,-40.367 cw(c65.765,-39.471) 65.791,-40.367 65.792,-40.367 ccw(c65.765,-39.471) 66.661,-39.445 cw(c66.711,-39.443) 66.661,-39.443 66.661,-34.302 cw(c67.702,-34.215) 66.657,-34.215 cw(c67.702,-34.215) 67.212,-33.292 ccw(c65.838,-31.672) 67.961,-31.762 ccw(c65.838,-31.672) 67.961,-31.761 67.961,-31.763 67.961,-31.719 cw(c69.011,-31.717) 67.961,-31.717 cw(c69.011,-31.717)
cut-out: 46.725,-31.719 46.725,-31.763 cw(c46.674,-31.763) 46.724,-31.77 cw(c43.873,-31.364) 45.941,-33.369 cw(c43.873,-31.364) 45.94,-33.369 45.941,-33.369 cw(c45.904,-33.334) 45.93,-33.378 ccw(c46.464,-34.27) 45.425,-34.27 ccw(c46.464,-34.27) 45.425,-34.292 cw(c45.374,-34.294) 45.425,-34.294 45.425,-39.488 cw(c42.45,-39.494) 42.456,-42.468 cw(c42.456,-42.418) 42.456,-42.468 40.108,-42.468 38.875,-42.468 cw(c38.875,-42.418) 38.873,-42.468 37.567,-42.468 cw(c37.566,-39.492) 34.59,-39.493 cw(c34.64,-39.493) 34.59,-39.493 34.59,-34.55 cw(c34.64,-34.55) 34.59,-34.547 cw(c33.111,-34.482) 34.59,-34.547 ccw(c33.111,-34.482) 34.17,-33.448 cw(c35.252,-31.803) 33.284,-31.803 cw(c35.252,-31.803) 33.284,-31.762 cw(c35.252,-31.803) 33.284,-31.761 33.284,-31.762 33.284,-31.719 ccw(c33.334,-31.719) 33.284,-31.719 cw(c34.334,-31.717) 33.284,-31.717 cw(c34.334,-31.717) 35.385,-31.719 cw(c35.334,-31.719) 35.385,-31.719 35.385,-31.76 ccw(c37.688,-31.574) 36.232,-33.368 cw(c35.72,-34.194) 36.691,-34.149 cw(c36.64,-34.151) 36.691,-34.151 36.691,-39.493 ccw(c37.566,-39.492) 37.567,-40.367 cw(c37.567,-40.417) 37.567,-40.367 40.108,-40.367 42.455,-40.367 cw(c42.428,-39.471) 42.454,-40.367 42.455,-40.367 ccw(c42.428,-39.471) 43.324,-39.445 cw(c43.374,-39.443) 43.324,-39.443 43.324,-34.302 cw(c44.365,-34.215) 43.32,-34.215 cw(c44.365,-34.215) 43.875,-33.292 ccw(c42.501,-31.672) 44.624,-31.762 ccw(c42.501,-31.672) 44.624,-31.761 44.624,-31.763 44.624,-31.719 cw(c45.674,-31.717) 44.624,-31.717 cw(c45.674,-31.717)
cut-out: 46.674,-18.069 ccw(c45.674,-18.067) 44.674,-18.069 44.674,-27.719 ccw(c45.674,-27.722) 46.674,-27.719
cut-out: 35.337,-18.069 ccw(c34.337,-18.068) 33.337,-18.069 33.337,-27.719 ccw(c34.337,-27.72) 35.337,-27.719
cut-out: 42.625,-9.95 ccw(c42.624,-10) 42.624,-9.95 37.39,-9.95 ccw(c37.386,-14.048) 33.288,-14.044 ccw(c33.338,-14.044) 33.288,-14.044 33.288,-14.069 ccw(c34.338,-14.074) 33.288,-14.074 ccw(c34.338,-14.074) 35.389,-14.069 ccw(c34.338,-14.074) 35.389,-14.069 35.389,-14.044 ccw(c35.338,-14.044) 35.389,-14.039 ccw(c35.338,-14.033) 35.389,-14.037 cw(c37.505,-14.168) 37.392,-12.051 37.939,-12.051 42.623,-12.051 cw(c42.501,-14.173) 44.624,-14.069 ccw(c44.674,-14.069) 44.624,-14.069 ccw(c44.674,-14.069) 44.624,-14.072 ccw(c45.674,-14.069) 46.725,-14.069 ccw(c45.674,-14.069) 46.725,-14.069 ccw(c42.606,-14.068) 46.725,-14.068 cw(c46.674,-14.069) 46.725,-14.069 46.725,-14.068 ccw(c42.606,-14.068)

## Design rules (kind name [scope] priority, off if disabled: settings)
Clearance [All] p1 off: gap=0.254 ignorepadtopadclearanceinfootprint=FALSE except(0: Arc-Hole Track-Hole SMDPad-Hole THPad-Hole Via-Hole Fill-Hole Poly-Hole Region-Hole Text-Hole)
PolygonConnect [All] p1: connectstyle=Relief reliefconductorwidth=0.254 reliefentries=4 polygonreliefangle="90 Angle" airgapwidth=0.254
RoutingVias [All] p1: holewidth=0.711 width=1.27 viastyle="Through Hole" minholewidth=0.711 minwidth=1.27 maxholewidth=0.711 maxwidth=1.27
SolderMaskExpansion [All] p1: expansion=0.102 istentingtop=FALSE
Width [All] p1 off: maxlimit=0.254 minlimit=0.254 preferedwidth=0.254
30 further rules are at their usual default settings.

## Components (designator, comment, footprint, x,y, rotation, side; value= is the part's Value field where it differs from the comment)
U? "Edge" "PCB Edge" -10.414,-21.941 r270 top

## Footprints (in the part's own frame and the unit in brackets; to place one, negate y for a bottom-side part, rotate by r counter-clockwise, add the part's x,y. Pads: shape width x height; smd on the part's side, far side on the other; paste and mask are expansions set on the pad)
"PCB Edge" [mm] "Microbit Male Edge connector"
  rect 1.2x5.08 all layers, no hole mask+0: 3v3_1(34.06,0) 3v3_2(35.37,0) 3v3_3(36.68,0) 3v3_4(37.99,0) 3v3_5(39.3,0) 3v3_6(40.61,0) GND_1(44.54,0) GND_2(45.85,0) GND_3(47.16,0) GND_4(48.47,0) GND_5(49.78,0) GND_6(51.09,0) P0_1(1.31,0) P0_1(1.31,0) P0_1(1.31,0) P0_2(2.62,0) P0_3(3.93,0) P0_4(5.24,0) P1_1(11.79,0) P1_2(13.1,0) P1_3(14.41,0) P1_4(15.72,0) P2_1(23.58,0) P2_2(24.89,0) P2_3(26.2,0) P2_4(27.51,0) P3(0,0) P3(0,0) P4(6.55,0) P5(7.86,0) P6(9.17,0) P7(10.48,0) P8(17.03,0) P9(18.34,0) P10(19.65,0) P11(20.96,0) P12(22.27,0) P13(28.82,0) P14(30.13,0) P15(31.44,0) P16(32.75,0) P19(41.92,0) P20(43.23,0)